# Altium PCB PANEL.PcbDoc
Units mm, origin at the board's own origin, x right, y up, seen from the top; angles counter-clockwise.
Board outline 80 x 36 mm, 2 copper layers (Top Layer, Bottom Layer), stack 1.071 mm thick; 72 components, 66 nets, 247 pads, 64 vias.
Unrouted connection lines stored in the file: 27.
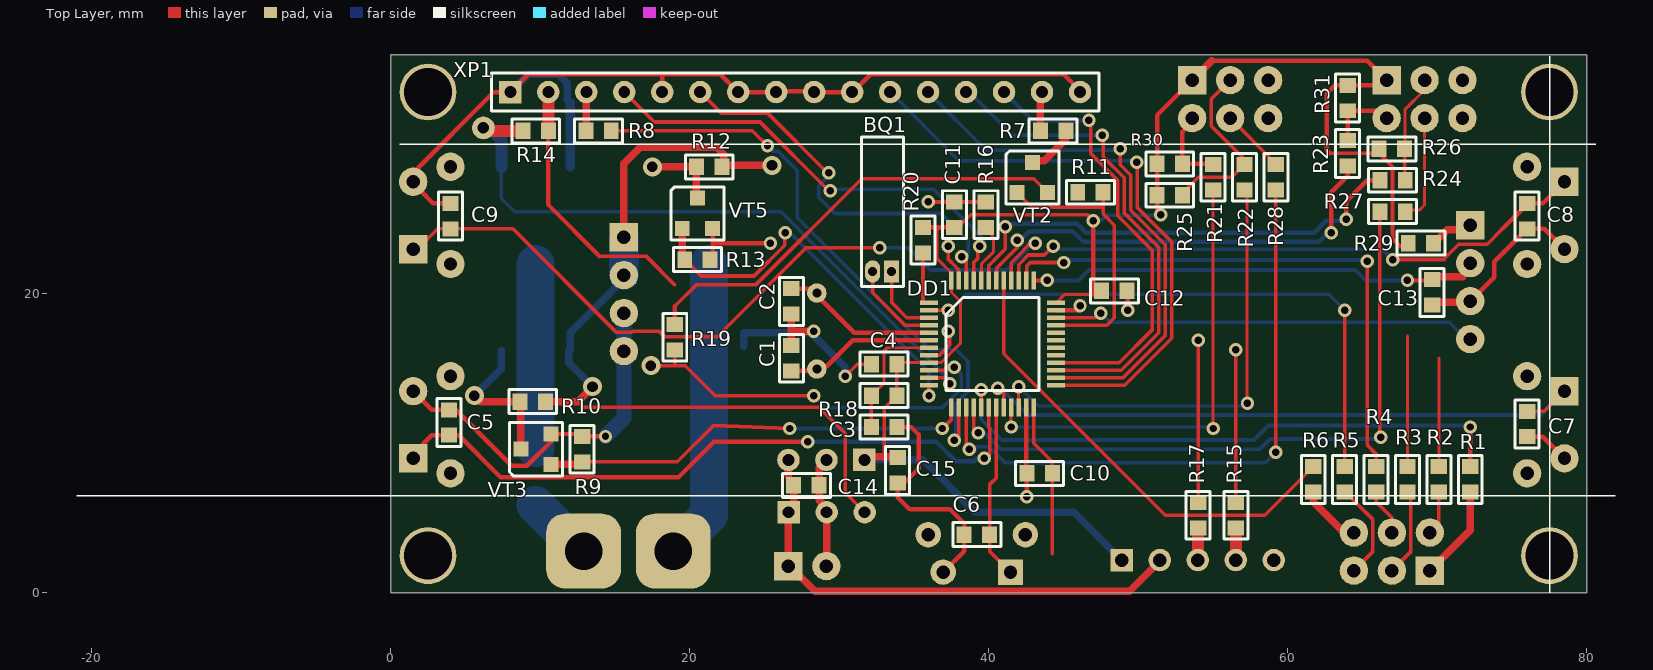
[diagram p0: Top Layer view]
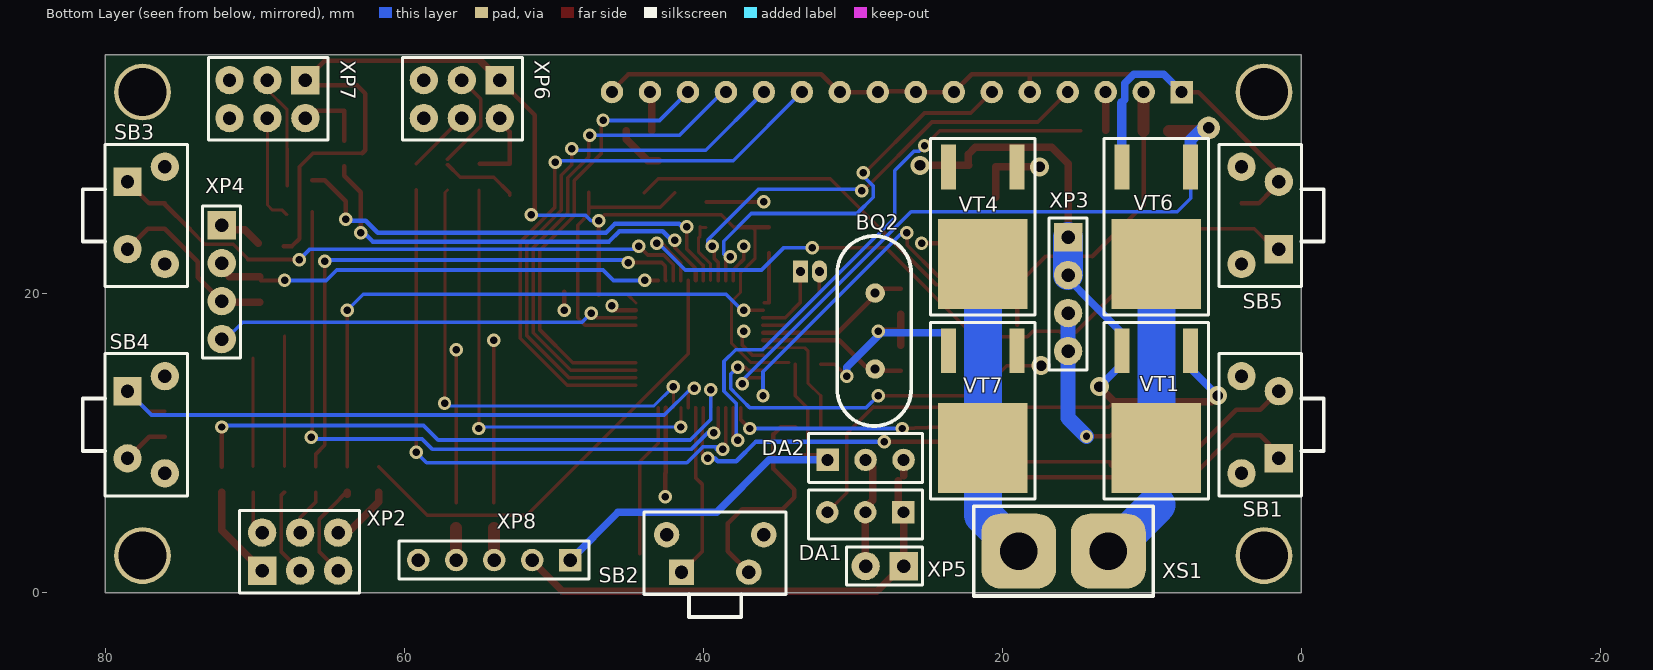
[diagram p1: Bottom Layer view, seen from below]

## Layer stack, top to bottom
Top Solder: solder mask 0.0102, Solder Resist, Dk 3.5
Top Layer: signal copper 0.0356
Dielectric1: core 1, FR-4, Dk 4.8
Bottom Layer: signal copper 0.0356
Bottom Solder: solder mask 0.0102, Solder Resist, Dk 3.5

## Board outline
0,0 0,36 80,36 80,0

## Design rules (kind name [scope] priority, off if disabled: settings)
Clearance [All] p1: gap=0.2
HoleSize HoleSize_1 [All] p1: absolutevalues=TRUE maxlimit=4 minlimit=0.025 maxpercent=80.000 minpercent=20.000
HoleSize [All] p2: absolutevalues=TRUE maxlimit=2.54 minlimit=0.025 maxpercent=80.000 minpercent=20.000
MinimumSolderMaskSliver MinimumSolderMaskSliver_1 [All] p1: minsoldermaskwidth=0
MinimumSolderMaskSliver [All] p2: minsoldermaskwidth=0
PolygonConnect PolygonConnect_isVia [isVia] p1: connectstyle=Direct reliefconductorwidth=0.254 reliefentries=4 polygonreliefangle="90 Angle" airgapwidth=0.254
PolygonConnect [All] p2: connectstyle=Relief reliefconductorwidth=0.254 reliefentries=4 polygonreliefangle="90 Angle" airgapwidth=0.254
RoomDefinition PANEL [InComponentClass('PANEL')] p1: confinementstyle=ConfineIn formatcopy=TRUE lockcomponents=FALSE outline -8,-11.23 115.7,-11.23 115.7,50.6 -8,50.6
RoutingVias [All] p1: holewidth=0.711 width=1.27 viastyle="Through Hole" minholewidth=0.2 minwidth=0.6 maxholewidth=0.711 maxwidth=1.27
SilkToSilkClearance SilkToSilkClearance_1 [All] p1: silktosilkclearance=0
SilkToSilkClearance [All] p2: silktosilkclearance=0
SilkToSolderMaskClearance [IsPad] p1: minsilkscreentomaskgap=0 clearancetoexposedcopper=TRUE
SolderMaskExpansion [All] p1: expansion=0.1
Width Width_1 [All] p1: maxlimit=5 minlimit=0.1 preferedwidth=0.3 minimp=50.000000 maximp=50.000000 favimp=50.000000
Width [All] p2: maxlimit=5 minlimit=0.254 preferedwidth=0.254
25 further rules are at their usual default settings.

## Components (designator, comment, footprint, x,y, rotation, side; value= is the part's Value field where it differs from the comment)
BQ1 "32768" WatchQ 33.5,21.5 r270 top
BQ2 "8M" "HC 49S" 28.5,13.2 r90 bottom
C1 "20" Cap_0805 26.8,15.7 r270 top
C2 "20" Cap_0805 26.8,19.5 r90 top
C3 "0,01uF" Cap_0805 33,11.1 r180 top
C4 "0.47uF" Cap_0805 33,15.3 r0 top
C5 "0,01uF" Cap_0805 3.9,11.4 r90 top
C6 "0,01uF" Cap_0805 39.2,3.9 r180 top
C7 "0,01uF" Cap_0805 76,11.3 r270 top
C8 "0,01uF" Cap_0805 76,25.2 r270 top
C9 "0,01uF" Cap_0805 4,25.2 r90 top
C10 "0.47uF" Cap_0805 43.4,8 r0 top
C11 "0.47uF" Cap_0805 37.7,25.3 r270 top
C12 "0.47uF" Cap_0805 48.4,20.2 r180 top
C13 "100" Cap_0805 69.65,20.1 r90 top
C14 "0.47uF" Cap_0805 27.8,7.2 r180 top
C15 "0.47uF" Cap_0805 33.9,8.2 r90 top
DA1 "L78L05" kren 31.7,5.4 r90 bottom
DA2 "L78L03" kren 26.6,8.9 r270 bottom
DD1 "STM32F100C8T6B" LQFP48 36,19.4 r0 top
R1 "220" Res_0805 72.2,7.6 r90 top
R2 "220" Res_0805 70.1,7.6 r90 top
R3 "220" Res_0805 68,7.6 r90 top
R4 "220" Res_0805 65.9,7.6 r270 top
R5 "220" Res_0805 63.8,7.6 r270 top
R6 "220" Res_0805 61.7,7.6 r90 top
R7 "1k" Res_0805 44.3,30.9 r180 top
R8 "1k" Res_0805 13.9,30.91 r180 top
R9 "1k" Res_0805 12.8,9.616 r90 top
R10 "1k" Res_0805 9.5,12.8 r180 top
R11 "10k" Res_0805 46.8,26.8 r0 top
R12 "1k" Res_0805 21.3,28.5 r0 top
R13 "1k" Res_0805 20.516,22.3 r180 top
R14 "1k" Res_0805 9.7,30.9 r0 top
R15 "100" Res_0805 56.52,5.2 r90 top
R16 "10k" Res_0805 39.8,25.3 r90 top
R17 "100" Res_0805 54,5.2 r90 top
R18 "51k" Res_0805 33,13.2 r0 top
R19 "1k" Res_0805 19,17.1 r270 top
R20 "10" Res_0805 35.6,23.6 r90 top
R21 "220" Res_0805 55,27.8 r270 top
R22 "220" Res_0805 57.1,27.8 r270 top
R23 "220" Res_0805 64,29.4 r270 top
R24 "220" Res_0805 67,27.6 r180 top
R25 "10k" Res_0805 52.1,26.6 r180 top
R26 "10k" Res_0805 66.96,29.7 r180 top
R27 "1k" Res_0805 67,25.5 r180 top
R28 "1k" Res_0805 59.2,27.8 r270 top
R29 "10k" Res_0805 68.9,23.4 r180 top
R30 "10k" Res_0805 52.1,28.7 r180 top
R31 "10k" Res_0805 64,33.1 r90 top
SB1 "TS A3PV 130" "TS A3PV 130"#1 8.5,13 r90 bottom
SB2 "TS A3PV 130" "TS A3PV 130"#2 37.45,8.4 r180 bottom
SB3 "TS A3PV 130" "TS A3PV 130"#1 71.5,23.5 r270 bottom
SB4 "TS A3PV 130" "TS A3PV 130"#1 71.5,9.5 r270 bottom
SB5 "TS A3PV 130" "TS A3PV 130"#1 8.5,27 r90 bottom
VT1 "NVD5117PL" TO-252 9,9.9 r0 bottom
VT2 "IRLML9303" SOT-23 41.9,28.8 r0 top
VT3 "N-CHAN_SOT-23" SOT-23 8.7,8.6 r90 top
VT4 "NVD5117PL" TO-252 20.6,22.2 r0 bottom
VT5 "N-CHAN_SOT-23" SOT-23 19.5,26.4 r0 top
VT6 "2SK3919" TO-252 9,22.2 r0 bottom
VT7 "2SK3919" TO-252 20.6,9.9 r0 bottom
XP1 "DISP16_2.54" DISP16_2.54 8,33.5 r90 top
XP2 "PLD-6" CONN_2.54_6_2 69.5,1.5 r90 bottom
XP3 "SWD" CONN_2.54_4 15.6,23.8 r180 bottom
XP4 "SWD" CONN_2.54_4 72.2,24.6 r180 bottom
XP5 "CONNECT_2.54_2" CONN_2.54_2 26.6,1.8 r270 bottom
XP6 "PLD-6" CONN_2.54_6_2 53.6,34.3 r270 bottom
XP7 "PLD6" CONN_2.54_6_2 66.6,34.3 r270 bottom
XP8 "UART_CONN" CONN_2.54_5 48.9,2.2 r270 bottom
XS1 "PELTIER" PELTIER 12.9,2.8 r270 bottom

## Footprints (in the part's own frame and the unit in brackets; to place one, negate y for a bottom-side part, rotate by r counter-clockwise, add the part's x,y. Pads: shape width x height; smd on the part's side, far side on the other; paste and mask are expansions set on the pad)
Cap_0805 [mm]
  rect 1x1.1 smd: 1(-0.85,0) 2(0.85,0)
  silkscreen extent -1.6,-0.8 1.6,0.8
CONN_2.54_2 [mm]
  rect 1.9x1.9 hole 0.9: 1(0,0)
  round 1.9 hole 0.9: 2(0,-2.54)
  silkscreen extent -1.27,-3.81 1.27,1.27
CONN_2.54_4 [mm]
  rect 1.9x1.9 hole 0.9: 1(0,0)
  round 1.9 hole 0.9: 2(0,-2.54) 3(0,-5.08) 4(0,-7.62)
  silkscreen extent -1.27,-8.89 1.27,1.27
CONN_2.54_5 [mm]
  rect 1.5x1.5 hole 0.9: 1(0,0)
  round 1.5 hole 0.9: 2(0,-2.54) 3(0,-5.08) 4(0,-7.62) 5(0,-10.16)
  silkscreen extent -1.27,-11.43 1.27,1.27
CONN_2.54_6_2 [mm]
  rect 1.9x1.9 hole 0.9: 1(0,0)
  round 1.9 hole 0.9: 2(2.54,0) 3(0,-2.54) 4(2.54,-2.54) 5(0,-5.08) 6(2.54,-5.08)
  silkscreen extent -1.5,-6.5 4,1.5
DISP16_2.54 [mm]
  rect 1.5x1.5 hole 0.8: 1(0,0)
  round 1.5 hole 0.8: 2(0,-2.54) 3(0,-5.08) 4(0,-7.62) 5(0,-10.16) 6(0,-12.7) 7(0,-15.24) 8(0,-17.78) 9(0,-20.32) 10(0,-22.86) 11(0,-25.4) 12(0,-27.94) 13(0,-30.48) 14(0,-33.02) 15(0,-35.56) 16(0,-38.1)
  silkscreen extent -1.27,-39.37 1.27,1.27
"HC 49S" [mm] "DIP QUARTZ"
  round 1.3 hole 0.6: 1(1.778,0) 2(6.858,0)
  silkscreen extent -2.03,-2.41 10.67,2.54
kren [mm] "L78L05"
  rect 1.5x1.5 hole 0.8: 1(0,-5.08)
  round 1.5 hole 0.8: 2(0,-2.54) 3(0,0)
  silkscreen extent -1.78,-6.35 1.5,1.27
LQFP48 [mm]
  rect 1.2x0.3 smd: 1(0,0) 2(0,-0.5) 3(0,-1) 4(0,-1.5) 5(0,-2) 6(0,-2.5) 7(0,-3) 8(0,-3.5) 9(0,-4) 10(0,-4.5) 11(0,-5) 12(0,-5.5) 25(8.5,-5.5) 26(8.5,-5) 27(8.5,-4.5) 28(8.5,-4) 29(8.5,-3.5) 30(8.5,-3) 31(8.5,-2.5) 32(8.5,-2) 33(8.5,-1.5) 34(8.5,-1) 35(8.5,-0.5) 36(8.5,0)
  rect 0.3x1.2 smd: 13(1.5,-7) 14(2,-7) 15(2.5,-7) 16(3,-7) 17(3.5,-7) 18(4,-7) 19(4.5,-7) 20(5,-7) 21(5.5,-7) 22(6,-7) 23(6.5,-7) 24(7,-7) 37(7,1.5) 38(6.5,1.5) 39(6,1.5) 40(5.5,1.5) 41(5,1.5) 42(4.5,1.5) 43(4,1.5) 44(3.5,1.5) 45(3,1.5) 46(2.5,1.5) 47(2,1.5) 48(1.5,1.5)
  silkscreen extent 1.13,-5.86 7.36,0.36
PELTIER [mm] "Peltier Element"
  rrect50% 5x5 hole 2.5: 1(0,0) 2(0,-6)
  silkscreen extent -3,-9 3,3
Res_0805 [mm]
  rect 1x1.1 smd: 1(-0.85,0) 2(0.85,0)
  silkscreen extent -1.6,-0.8 1.6,0.8
SOT-23 [mm]
  rect 1x1 smd: 1(0,-2.032) 2(2.032,-2.032) 3(1.016,0)
  silkscreen extent -0.76,-2.79 2.79,0.76
TO-252 [mm] "TO252"
  rect 1x3 smd: 1(-1.6,-6.3) 3(3,-6.3)
  rect 6x6 smd: 2(0.7,0.2)
  silkscreen extent -2.8,-8.2 4.2,3.6
"TS A3PV 130"#1 [mm] "Button"
  rect 1.9x1.9 hole 0.9: 1(-4,-7)
  round 1.9 hole 0.9: 2(0.5,-7) 3(-5,-4.5) 4(1.5,-4.5)
  silkscreen extent -6.5,-10 3,-3
"TS A3PV 130"#2 [mm] "Button"
  rect 1.7x1.7 hole 0.9: 1(-4,-7)
  round 1.7 hole 0.9: 2(0.5,-7) 3(-5,-4.5) 4(1.5,-4.5)
  silkscreen extent -6.5,-10 3,-3
WatchQ [mm] "Quartz"
  rect 1.5x1 hole 0.6: 1(0,0)
  oval 1.5x1 hole 0.6: 2(0,-1.27)
  silkscreen extent -9,-2 1,0.8

## Part data
BQ1: library part WatchQ
BQ2: library part "BQ_HC 49S"
C1 C2 C3 C4 C5 C6 C7 C8 C9 C10 C11 C12 C13 C14 C15: library part Cap_0805
DA1 DA2: library part kren
R1 R2 R3 R4 R5 R6 R7 R8 R9 R10 R11 R12 R13 R14 R15 R16 R17 R18 R19 R20 R21 R22 R23 R24 R25 R26 R27 R28 R29 R30 R31: library part Res_0805
SB1 SB2 SB3 SB4 SB5: "Button"
VT1 VT4: library part P-CHAN_TO-252
VT2: library part P-CHAN_SOT-23
VT6 VT7: library part N-CHAN_TO-252
XP2 XP6 XP7: library part CONNECT_2.54_6_2
XP3 XP4: library part CONNECT_SWD
XP8: library part CONNECT_2.54_5

## Free pads (board coordinates)
  round 3.8 hole 3.2: 0(2.5,2.5) 0(2.5,33.5) 0(77.5,2.5) 0(77.5,33.5)
  round 1.524 hole 0.762: 0(6.2,31.1)

## Via types
v1: diameter 0.9, hole 0.5, Top Layer to Bottom Layer, 59 vias
v2: diameter 1.27, hole 0.711, Top Layer to Bottom Layer, 5 vias

## Nets (pads, with @x,y where several pads share a name; then routed paths per layer and width w, separated by ;. In a path a pad name is that pad's centre, name@x,y a point inside that pad or via, vN(x,y) a via of type N, cw(c..) or ccw(c..) an arc to the next point about the centre after c; other vN are vias at no path point)
5V: C14.2 DA1.1 DA2.3 R11.1 R14.2 R19.1 VT2.2 XP1.2 XP5.1 XP8.2 | length 81.3
  Top Layer w0.24: 13.97,22.53 17.07,22.53 19,20.6 ; 19,19.17 20.43,20.6 24.4,20.6 31.5,27.7 43,27.7 VT2.2
  Top Layer w0.3: R14.2 10.55,25.95 13.97,22.53 ; R19.1 19,19.17
  Top Layer w0.5: DA1.1@26.6,5.38 XP5.1 26.7,1.8 28.4,0.1 49.4,0.1 51.44,2.14 XP8.2 ; 26.6,7.85 DA2.3 ; DA1.1@26.62,5.7 26.95,6.03 C14.2 C14.2@26.95,7.5
  Top Layer w0.8: R14.2@10.54,30.91 XP1.2
+12V: DA1.3 R10.1 R12.2 VT1.3 VT4.3 XP3.1 XP3.2 | length 56.3
  Top Layer w0.24: 12.5,12.8 12.87,12.43 28.619,12.43 28.624,12.436 30.4,10.66 30.4,6.7 DA1.3
  Top Layer w0.5: R10.1 12.5,12.8 v2(13.5,13.8) ; XP3.1 15.6,27.7 15.6,28.7 16.7,29.8 21.8,29.8 22.275,29.325 R12.2@22.275,28.625 ; R12.2@22.25,28.6 v2(25.5,28.6)
  Bottom Layer w0.5: v2(13.5,13.8) 11.9,15.4 11.9,16.2 VT1.3 12,17.4 13.97,19.37 XP3.2@15.6,21
  Bottom Layer w2: XP3.2 XP3.1
GND: C1.1 C2.1 C3.1 C4.1 C5.2 C6.2 C7.2 C8.2 C9.2 C10.1 C11.1 C12.1 C13.1 C14.1 C15.1 DA1.2 DA2.2 DD1.8 DD1.23 DD1.35 DD1.47 R9.2 R13.1 R16.2 SB1.2 SB2.2 SB3.2 SB4.2 SB5.2 VT3.2 VT5.2 VT6.3 VT7.3 XP1.1 XP1.5 XP1.7 XP1.8 XP1.9 XP1.10 XP1.16 XP3.3 XP3.4 XP4.3 XP5.2 XP6.6 XP7.6 XP8.5 | length 165.7
  Top Layer w0.24: v1(30.4,14.5) 31.2,15.3 C4.1 ; v1(35.95,26.15) C11.1 R16.2 ; DD1.8 36.706,15.9 37.4,16.594 37.4,17.5 v1(37.3,17.5) ; v1(37.3,23.2) 37.3,22.3 37.78,21.82 37.783,21.82 38,21.603 DD1.47
  Top Layer w0.3: SB1.2 2.75,12.25 C5.2 4.35,12.25 8.1,8.5 9.1,8.5 10.732,10.132 VT3.2 R9.2@12.634,10.632 ; C9.2 2.85,26.05 1.9,27 1.9,27.1 SB5.2 1.5,28.1 6.9,33.5 XP1.1 9.2,34.7 22.04,34.7 XP1.7 XP1.8 25.78,33.54 XP1.9@28.29,33.54 ; R9.2 v1(14.366,10.466) ; XP1.5 18.16,34.7 ; R13.1@21.532,22.466 21.532,23.4 ; VT5.2 21.532,23.4 ; v1(25.4,23.4) 21.532,23.4 ; XP1.9 28.29,33.53 28.29,33.5 30.9,33.5 32.1,34.7 45,34.7 46.1,33.6 XP1.16@46.2,33.6 ; C3.1 34.8,11.1 35.3,10.6 35.3,8.3 33.9,6.9 33.9,6.4 34.7,5.6 37.4,5.6 38.35,4.65 C6.2 38.35,2.8 SB2.2 ; C10.1@42.5,8.05 DD1.23 ; v1(42.55,6.45) C10.1 ; DD1.35 45.9,18.9 46,18.9 46.1,19 v1(46.1,19.2) ; v1(49.3,18.9) C12.1@49.3,20.15 ; XP4.3@71.87,19.45 72,19.32 XP4.3@72.2,19.12 ; XP4.3 73.8,21.12 73.8,22.15 C8.2 77.15,24.35 SB3.2 ; C7.2 77.05,10.45 SB4.2
  Top Layer w0.5: C1.1 26.8,17.5 ; C2.1 26.8,17.5 ; v1(28.3,17.5) 26.8,17.5 ; C14.1@28.65,7.5 C14.1 ; DA2.2@28.65,8.41 C14.1 ; XP5.2@29.16,1.82 DA1.2 ; DA1.2@29.16,5.7 28.65,6.21 C14.1 ; C13.1@69.65,19.45 XP4.3@71.87,19.45
  Bottom Layer w0.3: 11.8,32.977 12,32.777 ; VT6.3@12.1,28.4 VT6.3@12.1,28.5 ; XP1.10 XP1.10@30.86,33.66
  Bottom Layer w0.5: XP1.1 9.2,34.7 11.2,34.7 11.8,34.1 11.8,32.977 ; VT7.3@23.6,16.5 23.6,17.4 28.2,17.4 v1(28.3,17.5) 28.3,17.2 30.4,15.1 v1(30.4,14.5)
  Bottom Layer w0.65: VT6.3 12,32.777
  Bottom Layer w1: v1(14.366,10.466) 15.6,11.7 XP3.4 XP3.3
NetBQ1_1: BQ1.1 DD1.3 | length 5
  Top Layer w0.24: BQ1.1 33.5,19.422 34.522,18.4 DD1.3
NetBQ1_2: BQ1.2 DD1.4 | length 6.1
  Top Layer w0.24: BQ1.2 32.23,20.07 34.4,17.9 DD1.4
NetBQ2_1: BQ2.1 C1.2 DD1.6 | length 9.8
  Top Layer w0.3: C1.2 BQ2.1@28.372,14.85 ; BQ2.1@28.5,15.156 29.156,15.156 30.9,16.9 DD1.6
NetBQ2_2: BQ2.2 C2.2 DD1.5 | length 10.5
  Top Layer w0.2: BQ2.2@28.24,20.35 BQ2.2@28.532,20.058
  Top Layer w0.24: BQ2.2@28.532,19.868 BQ2.2@28.532,20.058
  Top Layer w0.3: C2.2 BQ2.2@28.24,20.35 ; BQ2.2@28.532,19.868 31,17.4 DD1.5
NetC3_2: C3.2 DD1.7 R18.1 | length 8.5
  Top Layer w0.2: R18.1 33,14.05 33,16.2 33.2,16.4 DD1.7
  Top Layer w0.24: C3.2 32.15,12 R18.1
NetC5_1: C5.1 DD1.18 SB1.1 | length 45.4
  Top Layer w0.24: v1@40,9.2 40.07,9.27 40.07,11.019 40,11.089 DD1.18
  Top Layer w0.3: SB1.1 1.5,9.3 2.75,10.55 C5.1 4.55,10.55 7.35,7.75 19.25,7.75 21.6,10.1 v1(27.9,10.1) ; v1(39.7,9) 39.8,9 v1@40,9.2
  Bottom Layer w0.3: v1(27.9,10.1) 36.5,10.1 37.8,8.8 39.031,8.8 39.231,9 v1(39.7,9)
NetC6_1: C6.1 DD1.19 SB2.1 | length 11.8
  Top Layer w0.24: DD1.19 40.51,12.39 40.51,7.71 40.05,7.25 C6.1 40.05,2.8 SB2.1
NetC7_1: C7.1 DD1.20 SB4.1 | length 43.7
  Top Layer w0.24: v1(40.6,13.7) v1@40.8,13.7 ; DD1.20 v1@41,13.5 ; C7.1 77.15,12.15 SB4.1
  Bottom Layer w0.24: v1(40.6,13.7) 40.8,13.7 42.6,11.9 76.9,11.9 SB4.1
NetC8_1: C8.1 DD1.39 SB3.1 | length 40.7
  Top Layer w0.24: DD1.39 42,21.955 42.645,22.6 43.7,22.6 v1(44.3,23.2) ; v1(67,22.3) 70.45,22.3 70.45,22.35 71.43,23.33 73.33,23.33 74.35,24.35
  Top Layer w0.3: 74.35,24.35 76,26 C8.1 77.05,26.05 SB3.1
  Bottom Layer w0.24: v1(44.3,23.2) 44.5,23 66.3,23 v1(67,22.3)
NetC9_1: C9.1 DD1.40 SB5.1 | length 52.4
  Top Layer w0.24: SB5.1 1.8,23 3.15,24.35 C9.1 8.174,24.35 15.074,17.45 16.126,17.45 16.176,17.5 17.947,17.5 18.317,17.13 21.83,17.13 27.8,23.1 v1(32.7,23.1) ; DD1.40 41.5,22.078 42.34,22.918 42.34,22.951 42.789,23.4 v1(43.1,23.4)
  Bottom Layer w0.24: v1(32.7,23.1) 34.6,23.1 36.1,21.6 41.2,21.6 43,23.4 v1(43.1,23.4)
NetC13_2: C13.2 DD1.37 XP4.2 | length 29.9
  Top Layer w0.2: 71.69,21.15 XP4.2@72.2,21.66
  Top Layer w0.24: DD1.37 v1(43.9,20.9) ; v1(68,20.9) C13.2@69.6,20.9
  Top Layer w0.5: C13.2@69.65,21.15 71.69,21.15
  Bottom Layer w0.24: v1(43.9,20.9) 46,20.9 46.7,21.6 64.5,21.6 65.2,20.9 v1(68,20.9)
NetDD1_1: DD1.1 R20.1 | length 3.6
  Top Layer w0.24: R20.1 35.6,19.4 DD1.1@35.9,19.4
NetDD1_10: DD1.10 R19.2 VT7.1 | length 30.1
  Top Layer w0.24: R19.2 19,15.2 v2(17.4,15.2) 19.7,15.2 21.7,13.2 v1(28.3,13.2) ; DD1.10 37,14.9 37.2,15.1 v1(37.7,15.1)
  Bottom Layer w0.24: VT7.1@19,15.2 VT7.1 ; v1(28.3,13.2) 29.1,12.4 36.9,12.4 37.36,12.86 37.719,13.219 37.719,13.23 38.17,13.681 38.17,14.63 37.6,15.2 v1@38,15.2
NetDD1_11: DD1.11 pad.0@6.2,31.1 R14.1 VT6.1 | length 44.7
  Top Layer w0.24: DD1.11 37,14.4 v1(37.4,14)
  Top Layer w0.8: pad.0@6.4,30.9 R14.1
  Bottom Layer w0.24: VT6.1 7.4,26.4 8.3,25.5 26.1,25.5 37.4,14.2 v1(37.4,14)
  Bottom Layer w0.8: pad.0@6.2,31.1 6.6,31.1 7.4,30.3 VT6.1
NetDD1_12: DD1.12 R13.2 VT5.1 | length 26.4
  Top Layer w0.24: R13.2 20.766,21.2 24.3,21.2 26.356,23.256 v1@26.356,24.056 ; v1(36,13.2) DD1.12
  Top Layer w0.5: R13.2@19.5,22.466 VT5.1
  Bottom Layer w0.24: v1@26.4,24 26.8,24 36,14.8 v1(36,13.2)
  other v1: 26.4,24.1
NetDD1_13: DD1.13 R9.1 VT3.1 | length 28.9
  Top Layer w0.24: R9.1 19.166,8.766 21.6,11.2 v1(26.7,11) v1@26.8,11.2 ; v1(36.9,11) 37.5,11.6 DD1.13
  Top Layer w0.5: VT3.1 R9.1@12.634,8.6
  Bottom Layer w0.24: v1(26.7,11) v1(36.9,11)
NetDD1_14: DD1.14 R8.1 | length 39.6
  Top Layer w0.24: R8.1 24.19,30.91 v1(25.2,29.9) ; v1(37.7,10.2) 38,10.5 DD1.14
  Bottom Layer w0.24: v1(25.2,29.9) 25.545,29.555 25.896,29.555 27.2,28.251 27.2,25.1 29.85,22.45 36.03,16.27 37.83,16.27 38.61,15.49 38.61,13.488 37.8,12.678 v1@37.8,10.6
NetDD1_15: DD1.15 R28.2 | length 41.9
  Top Layer w0.24: DD1.15 38.5,9.8 v1(38.7,9.6) ; v1(59.2,9.4) 59.2,9.9 R28.2
  Bottom Layer w0.24: v1(38.7,9.6) 39,9.7 39.106,9.594 39.111,9.6 39.111,9.77 40.019,9.77 41.089,8.7 58.5,8.7 v1(59.2,9.4)
NetDD1_16: DD1.16 R27.2 | length 44.6
  Top Layer w0.24: DD1.16 39,11 v1(39.3,10.7) ; R27.2 66.15,10.85 66.2,10.8 v1(66.2,10.4)
  Bottom Layer w0.24: v1(39.3,10.7) 39.711,10.7 40.811,9.6 58.1,9.6 58.8,10.3 65.2,10.3 v1@66.2,10.3
NetDD1_21: DD1.21 R21.2 | length 30.6
  Top Layer w0.2: v1(41.5,11.1) DD1.21 ; v1@55,11.2 R21.2
  Bottom Layer w0.2: v1(41.5,11.1) 54.9,11.1 v1(55,11)
NetDD1_22: DD1.22 R22.2 | length 31.3
  Top Layer w0.2: DD1.22 v1(42,13.8) ; R22.2 57.27,26.78 v1@57.27,13.07
  Bottom Layer w0.2: v1(42,13.8) 43.3,12.5 57.1,12.5 v1(57.3,12.7)
NetDD1_25: DD1.25 XP1.11 | length 40.1
  Top Layer w0.24: DD1.25 49.1,13.9 52.24,17.04 52.24,23.471 49.94,25.771 v1@49.94,28.7
  Bottom Layer w0.24: XP1.11 38,28.9 49.8,28.9 v1(49.9,28.8)
NetDD1_26: DD1.26 XP1.12 | length 36.7
  Top Layer w0.24: DD1.26 48.978,14.4 51.8,17.222 51.8,23.289 49.5,25.589 49.5,27.945 48.8,28.645 v1(48.8,29.7)
  Bottom Layer w0.24: XP1.12 39.84,29.6 48.7,29.6 v1(48.8,29.7)
NetDD1_27: DD1.27 XP1.13 | length 33.2
  Top Layer w0.24: DD1.27 48.856,14.9 51.36,17.405 51.36,23.107 49.06,25.407 49.06,27.762 47.661,29.161 47.661,30.539 v1(47.6,30.6)
  Bottom Layer w0.24: XP1.13 38.7,33.5 41.6,30.6 47.3,30.6 47.5,30.8 47.6,30.7 v1(47.6,30.6)
NetDD1_28: DD1.28 XP1.14 | length 29.6
  Top Layer w0.24: DD1.28 48.733,15.4 50.92,17.587 50.92,22.924 48.62,25.224 48.62,27.58 46.83,29.37 46.83,31.47 v1(46.7,31.6)
  Bottom Layer w0.24: XP1.14 42.92,31.6 v1(46.7,31.6)
NetDD1_30: DD1.30 R15.2 | length 10.2
  Top Layer w0.24: R15.2 v1(56.52,16.28)
NetDD1_31: DD1.31 R17.2 | length 10.9
  Top Layer w0.24: R17.2 v1(54,16.9)
NetDD1_33: DD1.33 R11.2 VT2.1 | length 19
  Top Layer w0.24: VT2.1 42.868,25.8 46.536,25.8 47.65,25.8 ; DD1.33 47.9,17.9 48.4,18.4 48.4,24.6 47.65,25.35 R11.2
NetDD1_34: DD1.34 XP4.4 | length 28.5
  Top Layer w0.24: DD1.34 47.1,18.4 47.4,18.7 v1(47.5,18.7)
  Bottom Layer w0.24: v1(47.5,18.7) 48.1,18.1 70.8,18.1 71.92,16.98 XP4.4
NetDD1_42: DD1.42 R23.2 | length 30.3
  Top Layer w0.24: DD1.42@40.5,21.4 40.53,21.43 40.53,21.73 41.9,23.1 v1(41.9,23.6)
  Top Layer w0.3: DD1.42 DD1.42@40.5,21.4 ; v1(62.9,24.1) 62.9,26.8 64,27.9 R23.2
  Bottom Layer w0.3: v1(41.9,23.6) 41.9,23.4 42.1,23.6 42.7,24.2 45.6,24.2 46.3,23.5 47.4,23.5 62.1,23.5 62.8,24.2 v1(62.9,24.1)
NetDD1_43: DD1.43 R24.2 | length 32.2
  Top Layer w0.24: DD1.43@40,21.4 DD1.43 40,21.9 40.09,21.99 40.535,22.435 41.1,23 v1(41.1,24.5)
  Top Layer w0.3: v1(63.9,25) 63.9,26.2 65.3,27.6 R24.2
  Bottom Layer w0.3: v1(41.1,24.5) 41.2,24.4 41.3,24.4 41.6,24.7 45.9,24.7 46.5,24.1 61.769,24.1 62.569,24.9 63.8,24.9 v1(63.9,25)
NetDD1_44: DD1.44 R16.1 | length 4.4
  Top Layer w0.2: DD1.44 39.5,21.994 40.3,22.794 40.3,23.761 40.2,23.861 40.2,24.5 40.15,24.45 R16.1
NetDD1_45: DD1.45 XP1.4 | length 31.3
  Top Layer w0.24: XP1.4 17.62,31.5 24.7,31.5 29.3,26.9 v1(29.4,26.9) ; DD1.45 39,22.1 39.25,22.35 v1@39.25,22.8 ; v1@39.4,23.1 v1(39.4,23.2)
  Bottom Layer w0.24: v1(29.4,26.9) 29.5,27 36.3,27 39.7,23.6 39.7,23.1 39.6,23 39.5,23 39.4,23.1 v1(39.4,23.2)
NetDD1_46: DD1.46 XP1.6 | length 27.2
  Top Layer w0.24: XP1.6 22.1,32.1 25.2,32.1 29.2,28.1 v1(29.3,28.1) ; v1(38.2,22.5) 38.38,22.5 38.5,22.38 DD1.46
  Bottom Layer w0.24: v1(29.3,28.1) 29.3,27.889 28.63,27.219 28.63,26.47 29.72,25.38 36.78,25.38 38.63,23.53 38.63,22.67 38.4,22.44 38.26,22.44 v1(38.2,22.5)
NetR1_1: R1.1 XP2.1 | length 6.4
  Top Layer w0.5: XP2.1 72.2,4.2 R1.1
NetR2_1: R2.1 XP2.2 | length 3
  Top Layer w0.24: XP2.2 70.1,4.64 R2.1
NetR3_1: R3.1 XP2.3 | length 5.9
  Top Layer w0.24: XP2.3 68.23,2.77 68.23,6.52 R3.1
NetR4_2: R4.2 XP2.4 | length 2.1
  Top Layer w0.24: R4.2 65.9,6.1 66.96,5.04
NetR5_2: R5.2 XP2.5 | length 6.7
  Top Layer w0.24: R5.2 63.85,6.75 64.78,5.82 65.69,4.91 65.69,2.77 XP2.5
  Top Layer w0.5: R5.2@63.8,6.6 R5.2
NetR6_1: R6.1 XP2.6 | length 4.2
  Top Layer w0.5: R6.1 61.7,6.1 63.76,4.04 XP2.6
NetR7_1: R7.1 VT2.3 | length 3.3
  Top Layer w0.5: VT2.3@43.016,28.9 43.7,28.9 45.15,30.35 R7.1
NetR7_2: R7.2 XP1.15 | length 2.5
  Top Layer w0.5: R7.2 XP1.15@43.45,33.39
NetR8_2: R8.2 XP1.3 | length 2.6
  Top Layer w0.5: R8.2@13.08,30.94 XP1.3
NetR10_2: R10.2 VT1.1 VT3.3 | length 10.1
  Top Layer w0.5: v2(5.6,13.2) 6,12.8 R10.2 ; VT3.3 R10.2@8.7,12.75
  Bottom Layer w0.5: v2(5.6,13.2) 7.4,15 VT1.1
NetR12_1: R12.1 VT4.1 VT5.3 | length 5
  Top Layer w0.5: v2(17.5,28.5) R12.1 VT5.3@20.45,26.466
NetR15_1: R15.1 XP8.4 | length 2.1
  Top Layer w0.8: XP8.4 R15.1
NetR17_1: R17.1 XP8.3 | length 2.1
  Top Layer w0.8: XP8.3@54,2.22 R17.1
NetR21_1: R21.1 R30.1 XP6.2 | length 5.3
  Top Layer w0.24: XP6.2@53.6,31.5 XP6.2
  Top Layer w0.3: XP6.2@53.6,31.5 52.95,30.85 R30.1 R21.1@54.95,28.7
NetR22_1: R22.1 R25.1 XP6.3 | length 12.2
  Top Layer w0.24: R25.1 52.95,26.75 54,27.8 56.25,27.8 R22.1 ; XP6.3 54.87,33.03 54.87,31.23 R22.1@57.1,29
  Top Layer w0.3: XP6.3@56.14,33.94 XP6.3
NetR23_1: R23.1 R31.1 XP7.2 | length 4.1
  Top Layer w0.3: R23.1 R31.1 XP7.2@66.11,32.25
NetR24_1: R24.1 R26.1 XP7.3 | length 7.9
  Top Layer w0.2: R26.1@67.85,29.35 67.85,32.35 69.14,33.64 XP7.3
  Top Layer w0.24: R24.1@67.81,27.24 R26.1
NetR27_1: R27.1 XP7.4 | length 7.4
  Top Layer w0.2: R27.1@67.85,25.3 68.15,25.6 68.8,25.6 69.14,25.94 XP7.4
NetR28_1: R28.1 XP6.4 | length 4.3
  Top Layer w0.24: XP6.4 R28.1@59.2,28.7
NetR29_1: R29.1 XP4.1 | length 2.9
  Top Layer w0.5: R29.1 70.65,24.3 XP4.1@72.28,24.3
NetVT1_2: VT1.2 VT6.2 XS1.1 | length 16.8
  Bottom Layer w2.54: 9.7,5.9 XS1.1@12.9,2.7 ; VT1.2 VT6.2
NetVT4_2: VT4.2 VT7.2 XS1.2 | length 20.6
  Bottom Layer w2.54: XS1.2@18.9,2.7 XS1.2 ; XS1.2@18.9,3.1 XS1.2 ; VT4.2 VT7.2 21.3,5.2 XS1.2
P1: DD1.17 R1.2 | length 39.6
  Top Layer w0.24: DD1.17 v1(39.5,13.6)
  Top Layer w0.3: R1.2 v1(72.2,11.1)
  Bottom Layer w0.24: v1(39.5,13.6) 39.5,11.6 40.87,10.23 57.73,10.23 58.7,11.2 72,11.2 72.1,11.1 v1(72.2,11.1)
P2: DD1.29 R2.2 | length 7.3
  Top Layer w0.2: R2.2 70.1,15.7
P3: DD1.32 R3.2 | length 8.8
  Top Layer w0.2: R3.2 68,17.2
P4: DD1.38 R4.1 | length 37.8
  Top Layer w0.24: DD1.38 42.53,20.93 42.53,21.863 42.767,22.1 v1(45,22.1) ; v1(65.3,22.2) 65.3,9.9 65.9,9.3 R4.1
  Bottom Layer w0.24: v1(45,22.1) 45.17,22.27 v1@65.23,22.27
P5: DD1.2 R5.1 | length 39.5
  Top Layer w0.24: DD1.2 v1(37.3,18.9) ; R5.1 v1(63.8,18.9) ; v1(37.3,18.9) 37.4,18.9 v1(37.3,18.9)
  Bottom Layer w0.24: v1@37.221,18.9 v1@37.4,18.9 ; v1(37.3,18.9) v1@37.4,18.9 ; v1(63.8,18.9) 62.73,19.97 38.47,19.97 v1@37.4,18.9
P6: DD1.41 R6.2 | length 31.4
  Top Layer w0.24: DD1.41 41,16 51.8,5.2 58.45,5.2 R6.2
VCC: C4.2 C10.2 C11.2 C12.2 C15.2 DA2.1 DD1.9 DD1.24 DD1.36 DD1.48 R18.2 R20.2 R25.2 R26.2 R29.2 R30.2 R31.2 XP6.1 XP7.1 XP8.1 | length 118.2
  Top Layer w0.2: C4.2@34.25,15.4 DD1.9 ; DD1.9@36.05,15.45 36.1,15.4 36.8,15.4 38.1,16.7 38.1,19.5 37.5,20.1 DD1.48 37.5,21.4 36.55,22.35 36.55,24.3 36.7,24.45 ; DD1.36 45.05,19.95 47,19.95
  Top Layer w0.24: 33,9.1 33,12.35 R18.2 C4.2 ; C11.2 37.95,24.45 38.8,25.3 46.6,25.3 v1(47,24.9) ; DD1.24 43,10.016 44.25,8.766 C10.2 44.25,2.63 ; XP8.1@48.47,2.63 XP8.1 ; 62.8,29.4 66.1,29.4 67,28.5 67,23.7
  Top Layer w0.3: R20.2 36.7,24.45 C11.2 ; 47,19.95 v1(47,24.9) ; v1(51.5,25.3) 51.25,25.55 R25.2 R30.2 51.25,31.95 XP6.1@53.15,33.85 ; 54.9,35.6 65.3,35.6 XP7.1 ; 62.8,29.4 62.6,29.6 62.6,33.4 63.15,33.95 R31.2 XP7.1@66.25,33.95 ; 67,23.7 67.5,23.2 R29.2@68.05,23.2
  Top Layer w0.5: DA2.1@31.7,9.1 32.9,9.1 ; 33,9.1 C15.2@33.85,9.1 ; XP6.1 54.9,35.6
  Bottom Layer w0.24: 47.5,24.9 47.85,25.25 v1@51.5,25.25
  Bottom Layer w0.5: DA2.1 35.6,8.9 39.1,5.4 45.7,5.4 XP8.1
pads on no net: SB1.3 SB1.4 SB2.3 SB2.4 SB3.3 SB3.4 SB4.3 SB4.4 SB5.3 SB5.4 XP6.5 XP7.5

## Silkscreen, mask and mechanical layers (free items; w line width, h text height)
Top Overlay:
  lines w0.1: -21,6.5 81.9,6.5 ; 0.6,30 80.6,30 ; 77.5,0 77.5,35.9
Mechanical 1:
  the board outline again, w0.1